# Altium PCB D1.PcbDoc (part 2 of 2)
Units mm, origin at the board's own origin, x right, y up, seen from the top; angles counter-clockwise.
Board outline 109.98 x 80.01 mm, 2 copper layers (Top Layer, Bottom Layer); 249 components, 156 nets, 1213 pads, 95 vias.
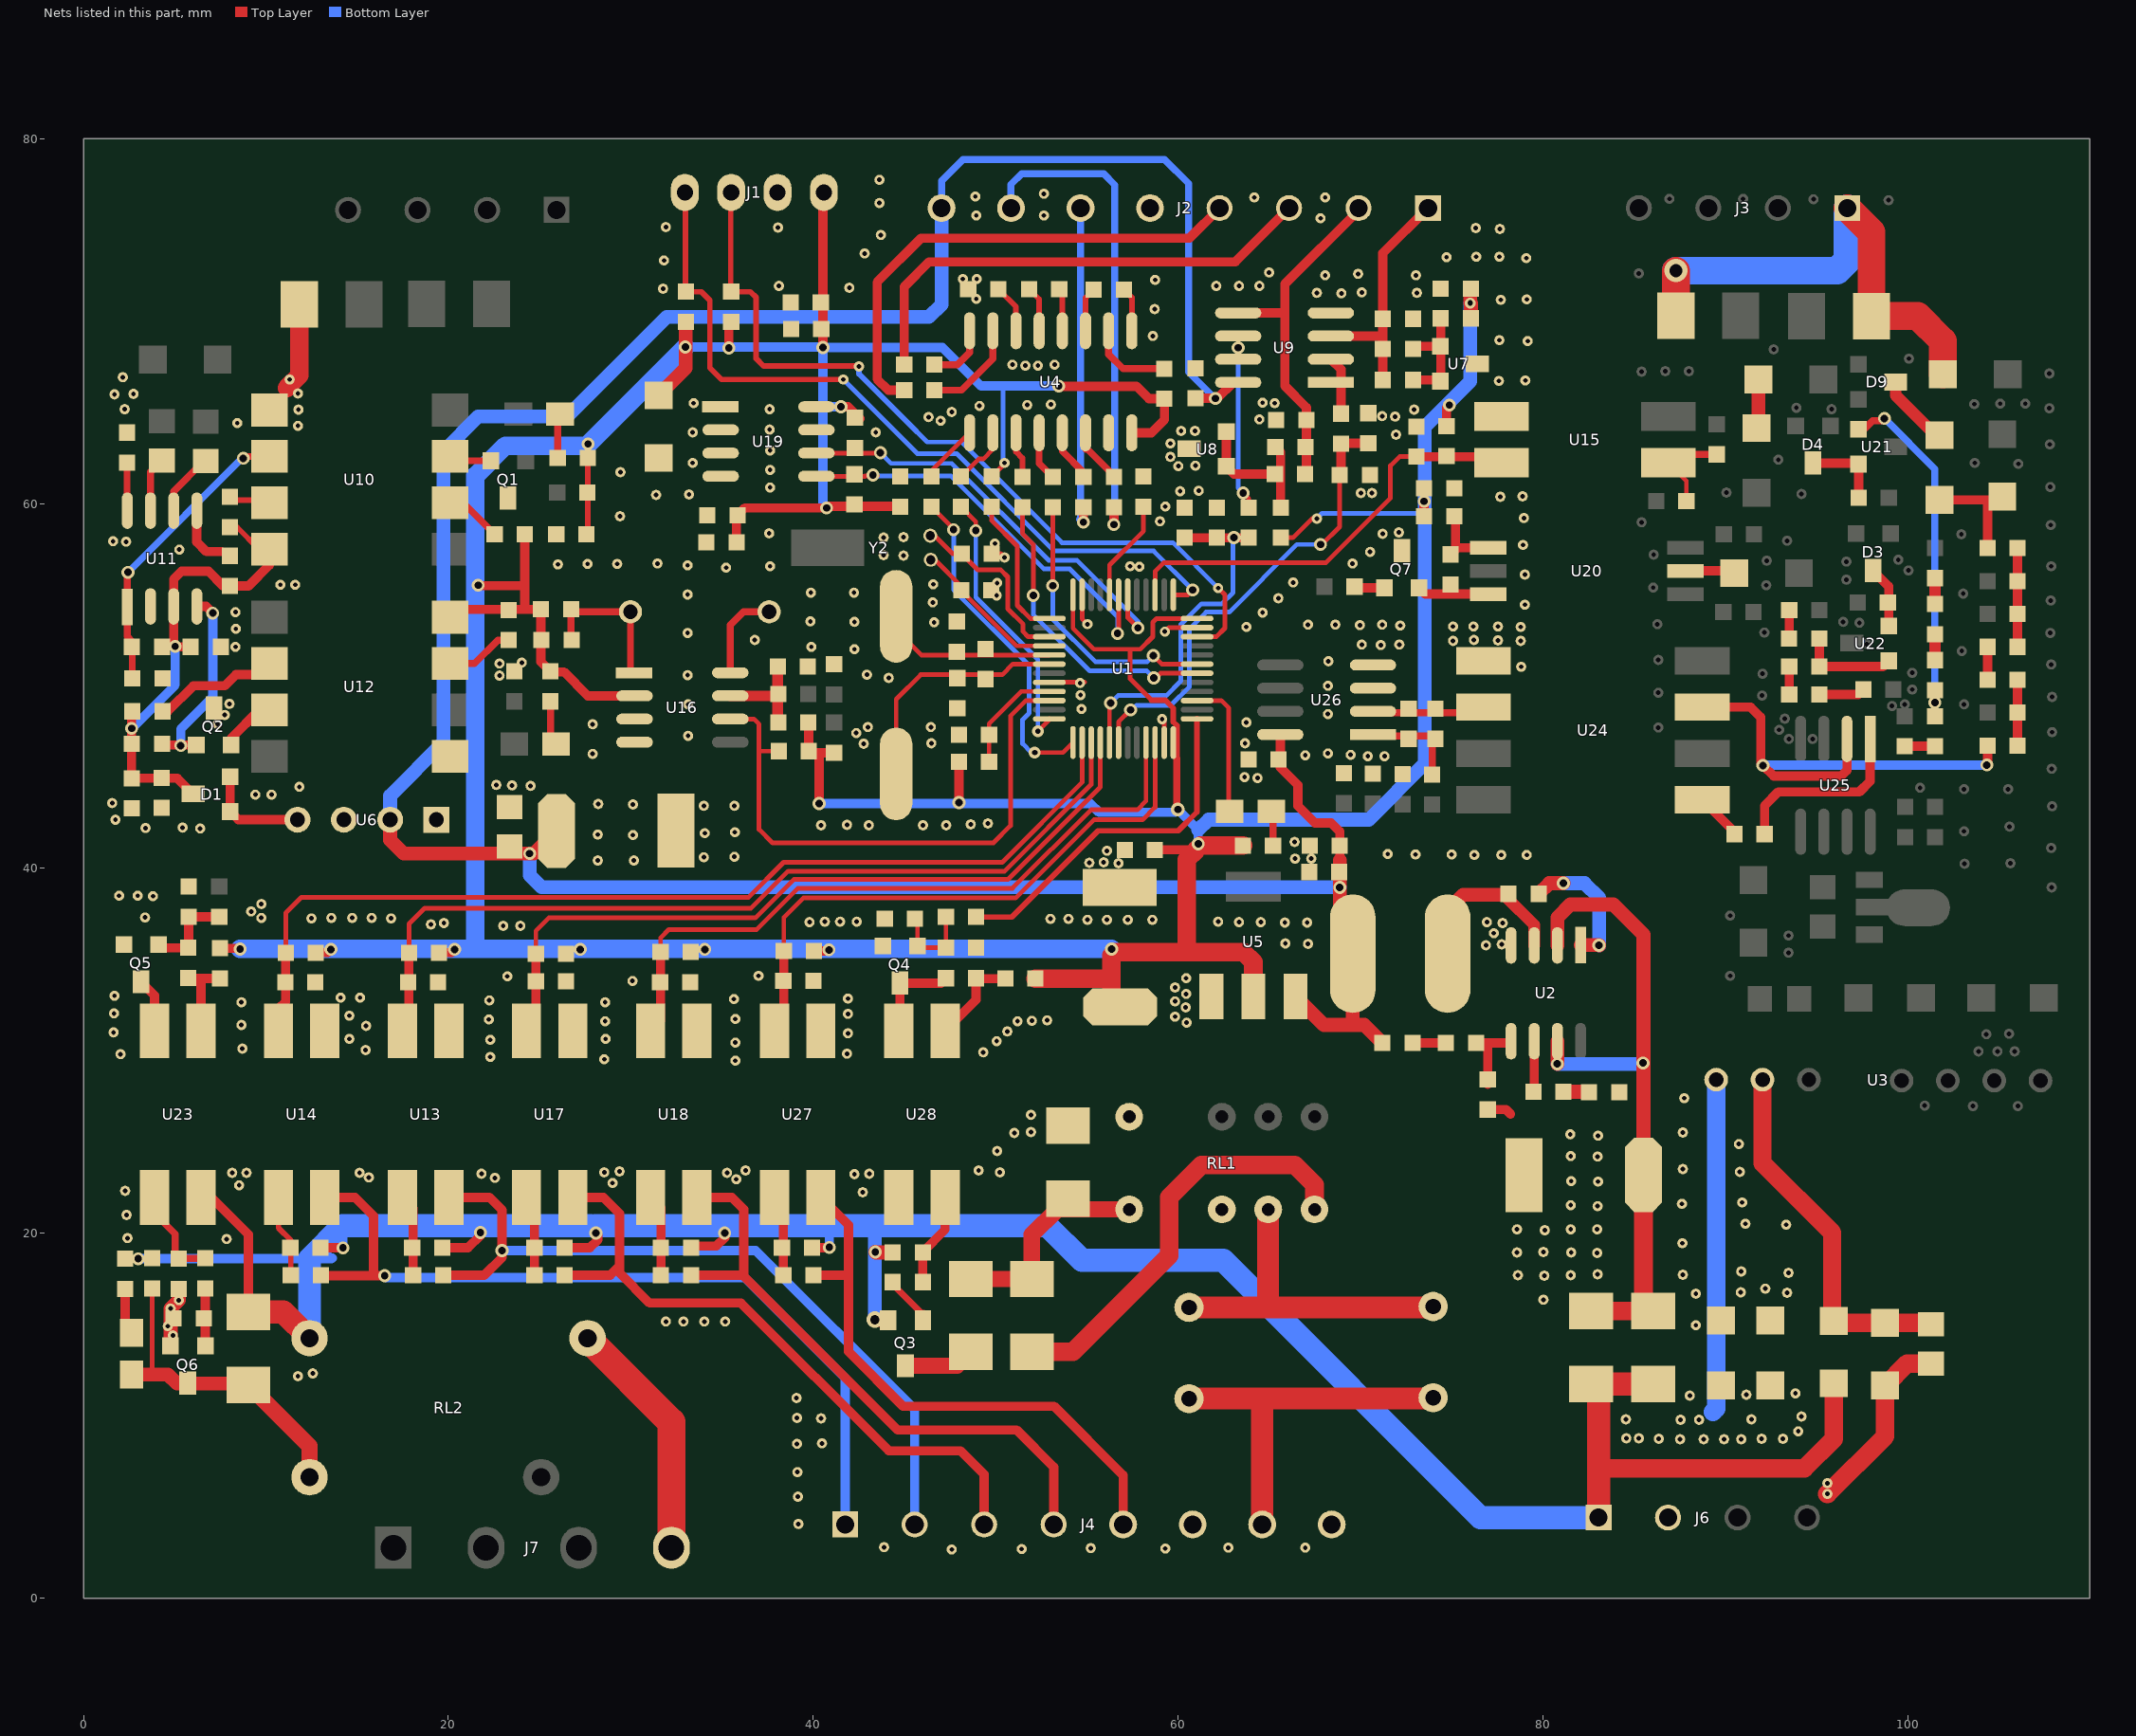
[diagram p2: the nets of this part, all layers, seen from the top]

## Via types
v1: diameter 0.711, hole 0.406, Top Layer to Bottom Layer, 77 vias
v2: diameter 0.559, hole 0.254, Top Layer to Bottom Layer, 12 vias
v3: diameter 0.66, hole 0.305, Top Layer to Bottom Layer, 2 vias
v4: diameter 0.914, hole 0.508, Top Layer to Bottom Layer, 1 vias
v5: diameter 1.27, hole 0.711, Top Layer to Bottom Layer, 1 vias
v6: diameter 0.762, hole 0.406, Top Layer to Bottom Layer, 1 vias
v7: diameter 0.61, hole 0.305, Top Layer to Bottom Layer, 1 vias

## Nets (pads, with @x,y where several pads share a name; then routed paths per layer and width w, separated by ;. In a path a pad name is that pad's centre, name@x,y a point inside that pad or via, vN(x,y) a via of type N, cw(c..) or ccw(c..) an arc to the next point about the centre after c; other vN are vias at no path point) (continued)
DGND: C1.2 C2.1 C3.1 C4.1 C8.1 C12.1 C14.1 C15.2 C16.2 C18.2 C19.2 C22.1 C23.1 C24.1 C25.1 C26.1 C28.2 C29.1 C30.1 C33.1 C34.1 C35.2 C38.2 C39.2 C41.2 C43.2 C44.2 C48.2 C49.2 C50.1 C51.1 C62.2 C66.1 C67.1 C68.1 C69.1 C71.2 EC1.2 EC2.2 EC5.2 J1.3 J2.5 L6.2 L7.2 pad.0@1.956,38.506 pad.1@2.972,38.506 pad.2@3.81,38.481 pad.3@3.378,37.313 pad.4@1.702,33.02 pad.5@1.676,32.055 pad.6@1.651,31.013 pad.7@2.032,29.82 pad.8@8.661,32.664 pad.9@8.661,31.42 pad.10@8.712,30.124 pad.11@9.754,38.049 pad.12@9.754,37.287 pad.13@9.195,37.643 pad.14@12.497,37.262 pad.15@13.589,37.287 pad.16@14.732,37.287 pad.17@15.799,37.287 pad.18@16.866,37.262 pad.19@14.097,32.918 pad.20@15.164,32.918 pad.21@14.58,31.928 pad.22@14.58,30.658 pad.23@15.494,31.369 pad.24@15.469,30.048 pad.25@19.05,36.932 pad.26@19.761,37.008 pad.27@23.012,36.855 pad.28@23.952,36.855 pad.29@23.241,34.087 pad.30@22.25,32.766 pad.31@22.225,31.725 pad.32@22.301,30.607 pad.33@22.301,29.667 pad.34@28.6,32.664 pad.35@28.6,31.623 pad.36@28.626,30.658 pad.37@28.55,29.54 pad.38@30.099,33.833 pad.39@37.008,34.112 pad.40@35.662,32.842 pad.41@35.738,31.75 pad.42@35.738,30.455 pad.43@35.738,29.464 pad.44@41.91,32.029 pad.45@41.91,30.963 pad.46@41.859,29.845 pad.47@41.91,32.868 pad.48@39.802,37.059 pad.49@40.64,37.084 pad.50@41.478,37.084 pad.51@42.393,37.084 pad.52@49.327,29.921 pad.53@50.063,30.531 pad.54@50.648,31.064 pad.55@51.206,31.623 pad.56@51.994,31.648 pad.57@52.832,31.674 pad.58@53.01,37.236 pad.59@54,37.236 pad.60@55.042,37.186 pad.61@56.109,37.186 pad.62@57.252,37.186 pad.63@58.598,37.186 pad.64@55.143,40.31 pad.65@55.931,40.335 pad.66@56.744,40.284 pad.67@56.109,40.97 pad.68@60.452,33.985 pad.69@60.452,33.122 pad.70@60.427,32.385 pad.71@60.477,31.547 pad.72@59.842,33.477 pad.73@59.842,32.715 pad.74@59.842,31.877 pad.75@62.205,37.084 pad.76@63.348,37.059 pad.77@64.541,37.059 pad.78@65.862,37.033 pad.79@67.081,37.033 pad.80@65.888,35.89 pad.81@67.132,35.865 pad.82@71.501,40.792 pad.83@73.025,40.767 pad.84@75.006,40.767 pad.85@76.251,40.742 pad.86@77.724,40.742 pad.87@79.121,40.742 pad.88@81.509,25.425 pad.89@81.534,24.232 pad.90@81.559,22.86 pad.91@81.534,21.539 pad.92@81.534,20.218 pad.93@81.559,18.948 pad.94@81.534,17.704 pad.95@83.033,25.349 pad.96@83.007,24.206 pad.97@83.033,22.835 pad.98@83.007,21.488 pad.99@82.982,20.218 pad.100@82.982,18.923 pad.101@83.007,17.755 pad.102@80.112,20.168 pad.103@78.588,20.218 pad.104@78.588,18.948 pad.105@80.035,18.974 pad.106@78.638,17.704 pad.107@80.086,17.678 pad.108@80.035,16.358 pad.109@87.757,27.407 pad.110@87.681,25.527 pad.111@87.681,23.52 pad.112@87.63,21.615 pad.113@87.655,19.456 pad.114 pad.115@88.392,16.688 pad.116@88.392,14.961 pad.117@90.754,24.892 pad.118@90.805,23.368 pad.119@92.202,16.967 pad.120@93.345,20.472 pad.121@90.932,21.692 pad.122@91.11,20.523 pad.123@90.881,17.907 pad.124@93.472,17.831 pad.125@90.856,16.764 pad.126@93.396,16.739 pad.132@22.631,44.577 pad.133@23.495,44.552 pad.134@24.511,44.526 pad.135@37.617,65.176 pad.136@37.617,64.059 pad.137@37.643,62.916 pad.138@37.643,61.849 pad.139@37.643,60.884 pad.140@29.439,61.722 pad.141@29.413,59.309 pad.142@31.394,60.477 pad.143@33.198,60.503 pad.144@26.01,56.667 pad.145@27.635,56.693 pad.146@29.261,56.693 pad.147@31.471,56.718 pad.148@33.122,56.617 pad.149@35.23,56.49 pad.150@37.592,58.369 pad.151@37.643,56.566 pad.152@43.866,58.141 pad.153@44.958,58.166 pad.154@43.866,57.175 pad.155@44.958,57.15 pad.156@39.878,55.118 pad.157@42.24,55.118 pad.158@39.853,53.543 pad.159@42.266,53.518 pad.160@39.903,52.146 pad.161@42.266,52.019 pad.162@42.951,50.622 pad.163@33.122,55.016 pad.164@33.122,52.908 pad.165@33.122,50.597 pad.166@33.147,48.997 pad.167@33.147,47.269 pad.168@28.219,43.536 pad.169@30.124,43.51 pad.170@28.194,41.859 pad.171@30.124,41.834 pad.172@28.194,40.437 pad.173@30.175,40.437 pad.174@34.011,43.434 pad.175@35.687,43.434 pad.176@34.061,41.935 pad.177@35.712,41.986 pad.178@34.011,40.615 pad.179@35.687,40.64 pad.180@43.002,47.752 pad.181@42.774,46.838 pad.182@46.457,47.752 pad.183@46.482,46.863 pad.184@44.145,50.444 pad.185@27.915,47.904 pad.186 pad.187 pad.188 pad.189 pad.190 pad.191 pad.192 pad.193 pad.194 pad.195 pad.196 pad.197 pad.198 pad.199 pad.200 pad.201 pad.202 pad.203 pad.204 pad.205 pad.206 pad.207 pad.208 pad.209 pad.210 pad.211 pad.212 pad.213 pad.214 pad.215 pad.216 pad.217 pad.218 pad.219 pad.220 pad.221 pad.222 pad.223 pad.224 pad.225 pad.226 pad.227 pad.228 pad.229 pad.230 pad.231 pad.232 pad.233 pad.234 pad.235 pad.236 pad.237 pad.238 pad.239 pad.240 pad.241 pad.242 pad.243 pad.244 pad.245 pad.246 pad.247 pad.248 pad.249 pad.250 pad.251 pad.252 pad.253 pad.254 pad.255 pad.256 pad.257 pad.258 pad.259 pad.260 pad.261 pad.262 pad.263 pad.264 pad.265 pad.266 pad.267 pad.268 pad.269 pad.270 pad.271 pad.272 pad.273 pad.274 pad.275 pad.276 pad.277 pad.278 pad.279 pad.280 pad.281 pad.282 pad.283 pad.284 pad.285 pad.286 pad.287 pad.288 pad.289 pad.290 pad.291 pad.292 pad.293 pad.294 pad.295 pad.296 pad.297 pad.298 pad.299 pad.300 pad.301 pad.302 pad.303 pad.304 pad.305 pad.306 pad.307 pad.308 pad.309 pad.311 pad.312 pad.313 pad.314 pad.315 pad.316 pad.317 pad.318 pad.319 pad.320 pad.321 pad.322 pad.323 pad.324 pad.325 pad.326 pad.327 pad.328 pad.329 pad.330 pad.331 pad.332 pad.333 pad.334 pad.335 pad.336 pad.337 pad.338 Q1.2 Q4.3 Q5.3 Q7.2 R6.2 R7.2 R19.1 R30.1 R31.1 R90.2 R91.1 R94.2 U1.8 U1.23 U1.35 U1.47 U2.4 U4.15 U5.1 U6.1 U7.2 U8.2 U9.4 U12.5 U13.3 U14.3 U15.3 U16.3 U16.4 U17.3 U18.3 U19.1 U19.2 U19.3 U19.4 U19.7 U24.5 U26.3 U26.4 U27.3 | length 9.8
  Top Layer w0.254: C30.1@49.771,55.334 C30.1@49.771,55.245 50.089,55.562 v2(50.089,55.651) ; C33.1@49.797,57.252 50.292,57.252 pad.330@50.495,57.048 ; U1.8@52.948,50.202 54.876,50.202 pad.322@54.889,50.216 ; U1.47@54.748,55.002 54.748,53.685 v2(55.042,53.391) ; v2(59.131,48.184) 59.248,48.067 U1.23@59.248,46.902 ; v2(59.284,52.984) 59.502,53.202 U1.35@61.048,53.202
  Top Layer w0.508: R6.2@76.987,26.784 77.991,26.784 78.232,26.543
  Bottom Layer w0.254: v2@50.013,55.118 50.013,55.016 v2(50.063,54.966)
  other v2: 49.962,57.81
DI1: C39.1 R49.1 U1.14 U14.4 | length 55.4
  Top Layer w0.254: R49.1@11.087,35.382 11.087,37.554 11.951,38.417 36.462,38.417 38.379,40.335 50.368,40.335 54.75,44.717 54.75,46.9 U1.14@54.748,46.902
  Top Layer w0.508: U14.4@10.692,31.105 10.692,32.307 11.087,32.703 R49.1@11.087,35.382
DI1-DET: C37.1 J4.1 U14.2 | length 45.4
  Top Layer w0.508: C37.1@13.018,17.704 13.043,17.678 v1(16.51,17.678) ; U14.2@13.232,21.961 14.894,21.961 15.9,20.955 15.9,17.704
  Bottom Layer w0.508: v1(16.51,17.678) 16.612,17.577 36.246,17.577 41.758,12.065 J4.1@41.758,4.039
DI2: C38.1 R47.1 U1.15 U13.4 | length 48.9
  Top Layer w0.254: R47.1@17.843,35.382 17.843,36.957 18.707,37.821 36.601,37.821 38.633,39.853 50.496,39.853 55.248,44.604 U1.15@55.248,46.902
  Top Layer w0.508: U13.4@17.49,31.105 17.843,31.458 R47.1@17.843,35.382
DI2-DET: C36.1 J4.2 U13.2 | length 42
  Top Layer w0.508: C36.1@19.723,17.704 21.971,17.704 22.941,18.674 v1(22.941,19.05) 22.941,21.28 22.26,21.961 U13.2@20.03,21.961
  Bottom Layer w0.508: v1(22.941,19.05) 36.855,19.05 45.568,10.338 J4.2@45.568,4.039
DI3: C48.1 R55.1 U1.16 U17.4 | length 42.3
  Top Layer w0.254: R55.1@24.803,35.331 24.803,36.576 25.514,37.287 36.83,37.287 38.938,39.395 50.673,39.395 55.748,44.47 U1.16@55.748,46.902
  Top Layer w0.508: U17.4@24.289,31.105 24.803,31.619 C48.1@24.803,33.807 R55.1@24.803,35.331
DI3-DET: C46.1 J4.3 U17.2 | length 37.4
  Top Layer w0.508: U17.2@26.365,21.497 U17.2@26.829,21.961 28.509,21.961 29.387,21.083 29.387,18.212 ; C46.1@26.378,17.704 28.879,17.704 29.387,18.212 ; J4.3@49.378,4.039 49.378,6.782 48.082,8.077 44.145,8.077 36.043,16.18 31.039,16.18 29.387,17.832 29.387,18.212
DI4: C49.1 R57.1 U1.21 U18.4 | length 38.2
  Top Layer w0.254: R57.1@31.636,35.433 31.636,36.195 32.093,36.652 36.906,36.652 39.167,38.913 50.927,38.913 55.232,43.218 57.772,43.218 58.248,43.693 U1.21@58.248,46.902
  Top Layer w0.508: U18.4@31.088,31.105 31.636,31.653 R57.1@31.636,35.433
DI4-DET: C47.1 J4.4 U18.2 | length 33.9
  Top Layer w0.508: C47.1@33.312,17.704 36.144,17.704 36.195,17.653 ; U18.2@33.628,21.961 35.545,21.961 36.195,21.311 36.195,17.653 ; J4.4@53.188,4.039 53.188,7.188 51.156,9.22 44.628,9.22 36.195,17.653
DI5: C71.1 R96.1 U1.22 U27.4 | length 32.8
  Top Layer w0.254: R96.1@38.392,35.484 38.392,37.313 39.459,38.379 51.105,38.379 55.397,42.672 58.064,42.672 58.748,43.355 U1.22@58.748,46.902
  Top Layer w0.508: U27.4@37.887,31.105 38.392,31.611 R96.1@38.392,35.484
DI5-DET: C70.1 J4.5 U27.2 | length 31.6
  Top Layer w0.508: C70.1@40.018,17.704 41.935,17.704 ; U27.2@40.427,21.961 41.935,20.452 41.935,17.704 ; J4.5@56.998,4.039 56.998,6.731 53.213,10.516 44.933,10.516 41.935,13.513 41.935,17.704
DP3V3: C1.1 C2.2 C3.2 C4.2 C11.2 C12.2 C18.1 C28.1 C31.1 C34.2 C42.1 C43.1 C44.1 EC5.1 J1.4 R1.2 R2.2 R3.2 R13.1 R18.2 R20.2 R21.2 R33.2 R36.2 R41.1 R42.1 R47.2 R49.2 R50.1 R53.2 R55.2 R57.2 R58.1 R59.1 R60.1 R61.1 R65.1 R77.1 R79.2 R96.2 R97.1 U1.24 U1.36 U1.48 U4.16 U5.2 U12.8 U16.2 U19.8 | length 320.6
  Top Layer w0.254: R18.2@49.784,61.481 50.495,62.192 v2(50.495,62.23) ; U1.48@54.248,55.002 54.248,53.169 55.397,52.019 57.379,52.019 ; 58.547,49.232 57.379,50.4 57.379,52.019 ; U1.36@61.048,53.702 58.833,53.702 58.623,53.492 58.623,52.705 57.937,52.019 57.379,52.019 ; R21.2@65.634,58.128 66.306,58.128 67.361,59.182 v2(67.615,59.182)
  Top Layer w0.305: C28.1@27.572,58.318 27.648,58.395 R36.2@27.648,62.509 27.648,63.259 v1(27.661,63.271) ; 58.547,49.232 59.302,49.232 59.748,48.787 59.748,48.031 59.944,47.835 59.944,46.05
  Top Layer w0.381: 59.944,46.05 59.944,43.282 v6(59.995,43.231)
  Top Layer w0.508: R79.2@7.493,35.623 8.547,35.623 v1(8.585,35.585) ; R49.2@12.738,35.382 13.386,35.382 v1(13.564,35.56) ; R47.2@19.494,35.382 20.168,35.382 v1(20.345,35.56) ; U12.8@20.088,53.772 20.52,54.204 24.232,54.204 ; v1(21.641,55.524) 21.666,55.499 24.194,55.499 ; R33.2@24.194,58.318 24.194,55.499 ; U16.2@30.209,49.46 27.654,49.46 26.34,50.775 25.641,50.775 R41.1@25.603,50.813 25.082,51.333 R53.2@25.082,54.204 24.232,54.204 ; v1(35.382,68.529) 35.382,69.837 R3.2@35.509,69.964 ; C34.2@35.801,57.887 35.801,59.309 C43.1@35.852,59.36 36.258,59.766 v1(40.742,59.766) 40.831,59.855 44.755,59.855 C4.2@44.78,59.83 ; R59.1@39.738,48.006 39.764,47.981 R58.1@39.764,46.431 39.853,46.342 40.488,46.342 ; R96.2@40.043,35.484 40.818,35.484 v1(40.869,35.535) ; v1(40.335,43.561) 40.335,46.19 40.488,46.342 ; v1(40.538,68.555) 40.538,77.013 J1.4@40.589,77.064 ; R60.1@41.148,46.342 40.488,46.342 ; v1(41.529,65.31) 41.917,65.31 R61.1@42.57,64.656 ; v1(47.993,43.612) R13.1@47.993,45.847 ; v1(53.467,66.446) 53.492,66.421 57.734,66.421 58.407,65.748 C11.2@59.258,65.748 59.258,64.592 58.552,63.886 U4.16@57.473,63.886 ; EC5.1@56.363,32.878 EC5.1@56.602,32.639 ; C3.2@58.738,41.021 61.011,41.021 v1@61.227,41.237 ; R97.1@73.495,59.309 v1(73.495,60.122) ; R50.1@74.727,64.249 74.727,65.253 v1(74.879,65.405) ; 24.194,55.499 24.194,54.242 24.232,54.204
  Top Layer w0.762: C1.1@31.534,65.936 33.02,67.423 R1.2@33.02,69.964 ; v7(76.022,70.993) C44.1@76.022,71.755 ; R20.2@76.06,70.155 v7@76.06,70.993
  Top Layer w1.016: R77.1@52.184,33.96 56.363,33.96 ; EC5.1@56.363,32.878 56.363,33.96 ; 56.363,35.23 56.363,33.96 ; v1@56.54,35.408 60.477,35.408 ; v1@61.011,41.021 60.477,40.488 60.477,35.408 ; v1@61.239,41.25 R2.2@63.564,41.25 ; U5.2@64.135,32.992 64.135,34.874 63.602,35.408 60.477,35.408
  Bottom Layer w0.254: v2(50.495,62.23) 50.419,62.154 50.419,66.345 50.521,66.446 ; v2(67.615,59.182) 67.894,59.461 73.533,59.461
  Bottom Layer w0.508: v1(32.995,68.58) 40.564,68.58 v1(40.538,68.555) ; v1(40.335,43.561) 55.194,43.561 55.677,43.078 59.842,43.078 v6(59.995,43.231) 61.112,42.113 v1(61.112,41.351) ; v1(40.742,59.766) 40.538,59.969 40.538,65.329 ; v1(41.529,65.31) 40.558,65.31 40.538,65.329 ; v1(53.467,66.446) 50.521,66.446 49.2,66.446 47.092,68.555 v1(40.538,68.555) ; 40.538,65.329 v1(40.538,68.555)
  Bottom Layer w0.762: 61.112,42.113 61.671,42.672 70.46,42.672 73.533,45.745 73.533,59.461 73.533,64.211 76.022,66.7 v7(76.022,70.993)
  Bottom Layer w1.016: v1(8.585,35.585) 21.488,35.585 ; v1@27.584,63.17 23.139,63.17 21.488,61.519 21.488,35.585 ; v1@27.673,63.259 v1(32.995,68.58) ; v1(56.363,35.585) 21.488,35.585
  other v1: 27.229,35.56 34.061,35.56
EL+: DC4.2 DC5.2 J4.7 | length 20.4
  Top Layer w1.2: DC5.2@60.604,10.937 64.618,10.937 ; J4.7@64.618,4.039 64.618,10.937 ; DC4.2@73.99,10.987 73.939,10.937 64.618,10.937
  Bottom Layer w1.2: DC4.2@73.939,10.937 DC4.2@73.99,10.987
FAN1: C55.2 D7.1 LED4.2 Q6.2 RL2.1 | length 18.2
  Top Layer w0.254: C55.2@3.759,16.98 3.759,12.418 3.912,12.266
  Top Layer w0.762: LED4.2@2.633,12.266 3.912,12.266 4.625,12.266 5.124,11.767 8.501,11.767 D7.1@8.797,12.063
  Top Layer w0.9: D7.1@8.797,12.063 D7.1@9.144,11.716 ; D7.1@9.042,11.691 12.395,8.338 RL2.1@12.395,6.629
FG: J3.1 L5.1 TVS3.1 TVS4.1 | length 27.7
  Top Layer w1.524: TVS3.1@87.3,70.307 v5(87.3,72.771) ; J3.1@96.698,76.2 98.019,74.879 TVS4.1@98.019,70.282 100.559,70.282 101.934,68.906 L5.1@101.934,67.093
  Bottom Layer w1.524: v5(87.3,72.771) 96.139,72.771 96.698,73.33 J3.1@96.698,76.2
IN-ADA: R84.2 U24.3 U25.2 | length 26.3
  Top Layer w0.508: U24.3@88.748,48.844 91.389,48.844 91.948,48.285 91.948,45.771 v1(92.075,45.644) 92.659,45.06 96.368,45.06 96.679,45.371 U25.2@96.679,47.098 ; v1(104.343,45.669) v1@104.381,45.631 ; R84.2@104.381,46.736 v1@104.381,45.631 ; v1@104.381,45.631 104.394,45.618 104.381,45.606 v1@104.381,45.631
  Bottom Layer w0.508: v1(92.075,45.644) 92.1,45.669 v1(104.343,45.669)
LOCK1: R85.1 U1.25 | length 19.6
  Top Layer w0.305: R85.1@48.933,37.338 50.902,37.338 55.626,42.062 60.02,42.062 61.048,43.09 U1.25@61.048,48.202
NetC5_2: C5.2 D12.2 DC1.1 U3.2 | length 20
  Top Layer w1: U3.2@92.05,28.423 92.05,23.851 95.86,20.041 D12.2@95.86,15.354 ; D12.2@95.961,15.202 96.078,15.086 101.147,15.086 C5.2@101.211,15.022
NetC7_2: C7.2 U2.1 | length 7.5
  Top Layer w0.762: C7.2@79.769,38.608 80.353,39.192 v1(81.128,39.192) ; U2.1@82.074,35.81 83.062,35.81 v1(83.083,35.789)
  Bottom Layer w0.762: v1(81.128,39.192) 82.296,39.192 83.083,38.405 v1(83.083,35.789)
NetC9_1: C9.1 U2.6 | length 2.5
  Top Layer w0.508: C9.1@79.515,28.067 79.534,28.086 U2.6@79.534,30.53
NetC9_2: C9.2 R7.1 | length 1.4
  Top Layer w0.762: C9.2@81.14,27.762 82.512,27.762 R7.1@82.537,27.737
NetC10_1: C10.1 U4.3 | length 2.4
  Top Layer w0.305: U4.3@54.933,69.474 54.933,71.281 C10.1@55.385,71.733
NetC10_2: C10.2 U4.1 | length 2.4
  Top Layer w0.305: C10.2@57.036,71.733 57.473,71.297 U4.1@57.473,69.474
NetC11_1: C11.1 U4.2 | length 4.7
  Top Layer w0.381: U4.2@56.203,69.474 56.203,68.181 56.985,67.399 C11.1@59.258,67.399
NetC13_1: C13.1 U4.5 | length 2.5
  Top Layer w0.305: C13.1@51.842,71.759 52.393,71.208 U4.5@52.393,69.474
NetC13_2: C13.2 U4.4 | length 2.4
  Top Layer w0.305: C13.2@53.493,71.759 53.663,71.589 U4.4@53.663,69.474
NetC14_2: C14.2 U4.6 | length 2.7
  Top Layer w0.305: C14.2@50.153,71.759 51.123,70.789 U4.6@51.123,69.474
NetC19_1: C19.1 R13.2 U1.9 | length 6.1
  Top Layer w0.254: R13.2@49.644,45.847 C19.1@49.644,47.32 49.644,47.937 51.41,49.702 U1.9@52.948,49.702
NetC32_1: C32.1 R35.1 U10.6 U11.1 | length 16.3
  Top Layer w0.381: v1(2.438,56.236) 2.438,56.197 2.407,56.166 U11.1@2.407,54.334 2.407,52.711 2.68,52.438 C32.1@2.68,50.419 ; v1(8.763,62.484) 8.865,62.586 U10.6@10.188,62.586
  Bottom Layer w0.381: v1(2.438,56.236) 8.687,62.484 v1(8.763,62.484)
NetC36_2: C36.2 R46.1 U13.1 | length 4.5
  Top Layer w0.508: U13.1@17.49,21.961 18.072,21.379 C36.2@18.072,17.704
NetC37_2: C37.2 R48.1 U14.1 | length 4.5
  Top Layer w0.308: U14.1@10.692,21.961 10.692,20.296 11.367,19.621 C37.2@11.367,17.704
NetC40_1: C40.1 R52.2 U15.1 | length 5.3
  Top Layer w0.254: U15.1@87.346,62.7 U15.1@86.883,62.238 87.871,61.25 R52.2@87.871,60.147
  Top Layer w0.381: U15.1@87.346,62.7 C40.1@89.535,62.7
NetC42_2: C42.2 R53.1 SW1.1 U16.1 | length 8.1
  Top Layer w0.381: C42.2@26.759,52.527 26.733,52.553 R53.1@26.733,54.204 26.871,54.066 SW1.1@29.987,54.066 U16.1@29.987,50.922
NetC46_2: C46.2 R54.1 U17.1 | length 4.4
  Top Layer w0.508: U17.1@24.289,21.961 24.727,21.523 R54.1@24.727,19.202 C46.2@24.727,17.704
NetC47_2: C47.2 R56.1 U18.1 | length 4.5
  Top Layer w0.508: U18.1@31.088,21.961 31.661,21.388 R56.1@31.661,19.202 C47.2@31.661,17.704
NetC50_2: C50.2 R59.2 R64.1 U16.7 | length 5.4
  Top Layer w0.584: U16.7@35.459,49.46 R64.1@37.827,49.46 ; R59.2@38.062,48.031 C50.2@38.062,51.079
NetC53_1: C53.1 D4.2 U21.3 | length 4.4
  Top Layer w0.508: D4.2@94.805,62.221 97.261,62.221 U21.3@97.316,62.166 97.32,62.163 C53.1@97.32,60.325
NetC54_1: C54.1 D3.2 U22.3 | length 3.4
  Top Layer w0.508: D3.2@98.107,56.328 98.965,55.471 U22.3@98.965,53.287
NetC56_1: C56.1 R77.2 U28.1 | length 5.2
  Top Layer w0.508: U28.1@47.236,31.105 48.933,32.802 C56.1@48.933,33.985 48.959,33.96 R77.2@50.533,33.96
NetC56_2: C56.2 Q4.2 U28.2 | length 5.3
  Top Layer w0.508: U28.2@44.696,31.105 44.757,31.165 Q4.2@44.757,33.712 47.009,33.712 C56.2@47.282,33.985
NetC57_1: C57.1 R79.1 U23.1 | length 4.6
  Top Layer w0.508: C57.1@5.766,33.972 6.502,33.972 ; U23.1@6.444,31.105 6.444,33.914 6.502,33.972 ; R79.1@7.493,33.972 6.502,33.972
NetC57_2: C57.2 Q5.1 R88.1 R90.1 | length 5.1
  Top Layer w0.508: Q5.1@4.117,35.82 4.288,35.649 C57.2@5.74,35.649 5.766,35.674 R90.1@5.766,37.351 R88.1@7.442,37.351
NetC58_1: C58.1 R86.1 R93.1 U26.1 | length 5.9
  Top Layer w0.381: U26.1@70.11,47.263 73.823,47.263 73.939,47.146 R93.1@73.939,45.148
NetC58_2: C58.2 R86.2 U24.6 U26.2 | length 6.8
  Top Layer w0.381: U26.2@70.11,48.533 76.437,48.533 U24.6@76.748,48.844
NetC60_1: C60.1 C61.1 R81.2 R82.1 | length 5.4
  Top Layer w0.508: R82.1@106.032,52.146 C60.1@106.032,53.95 R81.2@106.033,57.556
NetC62_1: C62.1 Q4.1 R85.2 R91.2 | length 4.8
  Top Layer w0.254: C62.1@45.58,37.236 45.722,37.095 Q4.1@45.722,35.744 45.805,35.662 R91.2@47.282,35.662 R85.2@47.282,37.338
NetC65_1: C65.1 Q6.1 R87.2 | length 3.2
  Top Layer w0.254: Q6.1@6.68,13.851 Q6.1@6.733,13.799
  Top Layer w0.508: Q6.1@6.68,13.851 R87.2@6.68,16.98
NetC70_2: C70.2 R95.1 U27.1 | length 4.5
  Top Layer w0.508: U27.1@37.887,21.961 38.367,21.481 C70.2@38.367,17.704
NetC72_1: C72.1 R97.2 U20.1 | length 4
  Top Layer w0.508: C72.1@74.955,57.213 C72.1@75.222,57.48 ; R97.2@75.222,59.309 C72.1@75.222,57.48 ; U20.1@77.013,57.582 75.324,57.582 C72.1@75.222,57.48
NetC72_2: C72.2 Q7.3 U20.3 | length 3.9
  Top Layer w0.508: Q7.3@73.216,55.381 73.555,55.042 U20.3@77.013,55.042
NetD1_1: D1.1 D1.3 U6.5 | length 5.8
  Top Layer w0.508: D1.3@8.043,45.022 D1.1@8.043,43.117 8.488,42.672 U6.5@11.735,42.672
NetD5_1: D5.1 Q3.2 | length 2.8
  Top Layer w0.889: Q3.2@45.06,12.74 D5.1@47.887,12.74
NetD5_2: D5.2 D6.1 D8.2 RL1.1 | length 11.7
  Top Layer w0.9: D5.2@48.641,17.494 D6.1@51.994,17.494 51.994,19.92 53.384,21.311 RL1.1@57.328,21.311
NetD6_2: D6.2 RL1.5 | length 23.4
  Top Layer w1.016: D6.2@51.994,13.494 54.236,13.494 59.512,18.771 59.512,21.971 61.29,23.749 66.396,23.749 67.488,22.657 RL1.5@67.488,21.311
NetD9_2: D9.2 L4.1 | length 4
  Top Layer w0.635: D9.2@99.348,66.662 99.348,65.93 101.524,63.754 L4.1@101.752,63.754
NetDC2_1: DC2.1 L4.2 R81.1 | length 6.2
  Top Layer w0.508: L4.2@101.752,60.198 104.216,60.198 ; R81.1@104.382,57.556 104.382,60.033 104.216,60.198 ; DC2.1@105.195,60.378 105.015,60.198 104.216,60.198
NetDC4_1: DC4.1 DC5.1 RL1.4 | length 18.9
  Top Layer w1.2: DC5.1@60.604,15.937 65.176,15.937 ; RL1.4@64.948,21.311 64.948,16.165 65.176,15.937 ; DC4.1@73.99,15.987 73.939,15.937 65.176,15.937
  Bottom Layer w1.2: DC4.1@73.939,15.937 DC4.1@73.99,15.987
NetL3_2: L3.2 R51.2 | length 2.7
  Top Layer w0.762: R51.2@91.72,64.143 91.821,64.244 L3.2@91.821,66.802
NetLED1_1: LED1.1 R2.1 | length 2.2
  Top Layer w0.381: LED1.1@65.149,43.417 65.215,43.352 R2.1@65.215,41.25
NetLED2_1: LED2.1 R36.1 | length 2.5
  Top Layer w0.381: R36.1@25.997,62.509 25.997,64.768 LED2.1@26.134,64.906
NetLED3_1: LED3.1 R41.2 | length 2.5
  Top Layer w0.381: R41.2@25.603,49.162 25.603,47.123 LED3.1@25.906,46.821
NetLED4_1: LED4.1 R98.2 | length 2.5
  Top Layer w0.508: R98.2@2.286,16.954 2.286,14.899 LED4.1@2.633,14.552
NetQ1_3: Q1.3 U10.3 | length 2.3
  Top Layer w0.381: U10.3@20.088,62.586 20.326,62.348 Q1.3@22.339,62.348
NetQ2_1: Q2.1 R45.2 U11.4 | length 10.9
  Top Layer w0.508: R45.2@4.305,46.838 4.373,46.77 Q2.1@6.185,46.77 ; U11.4@6.217,54.364 6.723,54.364 v1(7.087,54)
  Bottom Layer w0.508: v1(5.334,46.736) 5.334,47.65 7.087,49.403 v1(7.087,54)
NetQ2_3: Q2.3 U12.3 | length 3.1
  Top Layer w0.508: Q2.3@8.09,46.77 8.09,47.13 9.652,48.692 U12.3@10.188,48.692
NetQ3_1: Q3.1 R78.2 | length 2.7
  Top Layer w0.381: R78.2@44.272,17.297 44.272,17.323 R78.2@44.361,17.323 ; R78.2@44.361,17.209 46.076,15.494 Q3.1@46.076,15.608
NetQ5_2: Q5.2 U23.2 | length 3
  Top Layer w0.508: Q5.2@3.152,33.788 3.904,33.036 U23.2@3.904,31.105
NetQ7_1: Q7.1 R63.2 | length 1.7
  Top Layer w0.508: R63.2@69.685,55.448 69.752,55.381 Q7.1@71.311,55.381
NetR4_1: R4.1 R5.2 | length 1.8
  Top Layer w0.508: R5.2@72.86,30.429 R4.1@74.689,30.429
NetR4_2: R4.2 R6.1 U2.5 | length 4.3
  Top Layer w0.508: R4.2@76.34,30.429 77.114,30.429 ; R6.1@76.987,28.181 76.987,30.302 77.114,30.429 ; U2.5@78.264,30.53 78.163,30.429 77.114,30.429
NetR9_2: R9.2 U4.12 | length 2.7
  Top Layer w0.381: U4.12@52.393,63.886 52.393,62.208 R9.2@53.145,61.456
NetR10_1: R10.1 U4.13 | length 2.9
  Top Layer w0.381: U4.13@53.663,63.886 53.663,62.873 54.817,61.718 R10.1@54.817,61.455
NetR11_2: R11.2 U4.9 | length 3.3
  Top Layer w0.254: R11.2@46.482,61.481 46.482,61.785 U4.9@48.583,63.886
NetR12_1: R12.1 U4.8 | length 3.4
  Top Layer w0.381: R12.1@46.647,67.615 47.904,67.615 48.583,68.293 U4.8@48.583,69.474
NetR14_2: R14.2 U4.11 | length 2.6
  Top Layer w0.305: U4.11@51.123,63.886 51.123,62.847 51.473,62.497 R14.2@51.473,61.456
NetR15_1: R15.1 U4.14 | length 3.2
  Top Layer w0.381: U4.14@54.933,63.886 54.933,62.974 55.06,62.974 56.49,61.544 R15.1@56.49,61.455
NetR16_2: R16.2 U4.10 | length 3
  Top Layer w0.254: R16.2@48.108,61.481 49.075,62.448 49.327,62.448 49.853,62.974 U4.10@49.853,63.576
NetR17_1: R17.1 U4.7 | length 5.5
  Top Layer w0.381: R17.1@46.647,66.218 48.133,66.218 49.853,67.937 U4.7@49.853,69.474
NetR18_1: R18.1 U1.1 | length 8
  Top Layer w0.254: R18.1@49.784,59.83 49.784,59.08 51.194,57.671 51.194,54.419 51.911,53.702 U1.1@52.948,53.702
NetR19_2: R19.2 U1.44 | length 5.6
  Top Layer w0.254: U1.44@56.248,55.002 56.248,56.629 58.115,58.496 R19.2@58.115,59.83
NetR20_1: R20.1 R24.2 R25.2 U7.1 U7.3 | length 6.5
  Top Layer w0.508: R24.2@72.885,66.777 74.316,66.777 U7.3@74.38,66.713 74.409,66.742 R20.1@74.409,70.155 ; R25.2@72.885,68.478 73.025,68.618 U7.1@74.38,68.618
NetR21_1: R21.1 R26.2 R27.2 U8.1 U8.3 | length 8.2
  Top Layer w0.508: U8.3@62.653,63.945 U8.1@62.653,62.04 63.072,61.62 R27.2@65.316,61.62 ; R26.2@65.342,63.106 65.634,62.814 R21.1@65.634,59.779
NetR28_2: R28.2 U9.1 U9.2 | length 3.2
  Top Layer w0.508: U9.2@68.383,67.913 68.936,67.361 R28.2@68.936,64.935
NetR29_2: R29.2 U9.6 U9.7 | length 9
  Top Layer w0.254: v1(63.576,60.579) 63.881,60.274 R29.2@63.881,59.779
  Bottom Layer w0.254: v1(63.303,68.548) 63.303,60.852 v1(63.576,60.579)
NetR33_1: R33.1 U10.2 | length 3.2
  Top Layer w0.381: U10.2@20.088,60.046 20.815,60.046 R33.1@22.543,58.318
NetR34_1: R34.1 U10.7 | length 2.2
  Top Layer w0.305: R34.1@8.052,60.185 U10.7@10.049,60.185
  Top Layer w0.508: U10.7@10.049,60.185 U10.7@10.188,60.046
NetR37_1: R37.1 U11.8 | length 2.6
  Top Layer w0.381: R37.1@2.388,62.243 2.388,59.634 U11.8@2.407,59.614
NetR38_1: R38.1 U11.7 | length 3
  Top Layer w0.381: U11.7@3.677,59.614 3.677,61.741 R38.1@4.293,62.357
NetR39_1: R39.1 U11.6 | length 3.5
  Top Layer w0.381: U11.6@4.947,59.614 4.947,60.674 6.604,62.332 R39.1@6.706,62.332
NetR42_2: R42.2 U12.7 | length 3.8
  Top Layer w0.381: U12.7@20.088,51.232 21.438,51.232 22.72,52.514 R42.2@23.317,52.514
NetR43_2: R43.2 U12.2 | length 6.9
  Top Layer w0.508: R43.2@4.331,48.616 4.623,48.616 6.02,50.013 7.747,50.013 8.357,50.622 9.449,50.622 10.058,51.232 U12.2@10.188,51.232
NetR44_2: R44.2 U11.5 | length 3.3
  Top Layer w0.508: U11.5@6.217,59.614 6.217,57.893 6.744,57.366 7.569,57.366
NetR62_2: R62.2 U20.5 | length 2.8
  Top Layer w0.508: U20.5@87.813,56.312 90.467,56.312 R62.2@90.593,56.186
NetR66_1: R66.1 R69.2 | length 1.5
  Top Layer w0.508: R69.2@93.51,52.612 R66.1@93.51,54.153
NetR67_1: R67.1 R68.2 | length 1.4
  Top Layer w0.635: R68.2@101.498,54.496 R67.1@101.498,55.918
NetR68_1: R68.1 R70.2 | length 1.4
  Top Layer w0.635: R70.2@101.498,51.422 R68.1@101.498,52.845
NetR69_1: R69.1 R71.2 U22.1 | length 5.5
  Top Layer w0.508: R69.1@95.161,52.612 R71.2@95.161,51.071 98.654,51.071 U22.1@98.965,51.382
NetR70_1: R70.1 R72.2 U21.1 | length 18.4
  Top Layer w0.381: U21.1@97.316,64.071 97.625,64.071 98.095,64.541 98.603,64.541 v1(98.73,64.668)
  Bottom Layer w0.381: v1(98.73,64.668) 101.498,61.9 v1(101.498,49.098)
NetR71_1: R71.1 R73.2 | length 1.5
  Top Layer w0.508: R73.2@93.51,49.53 R71.1@93.51,51.071
NetR72_1: R72.1 R75.2 | length 1.7
  Top Layer w0.508: R75.2@99.847,46.698 R72.1@101.498,46.698
NetR73_1: R73.1 R74.2 | length 2.5
  Top Layer w0.508: R73.1@95.161,49.53 97.295,49.53 R74.2@97.574,49.809
NetR76_1: R76.1 R78.1 U28.4 | length 5.1
  Top Layer w0.5: R78.1@46.012,17.323 R76.1@46.012,18.948 46.012,18.986 47.236,20.211 U28.4@47.236,21.961
NetR80_1: R80.1 U25.1 | length 10.2
  Top Layer w0.508: R80.1@92.164,41.885 92.164,43.447 92.913,44.196 97.358,44.196 97.949,44.786 U25.1@97.949,47.098
NetR80_2: R80.2 U24.1 | length 2.6
  Top Layer w0.508: U24.1@88.748,43.764 90.513,41.999 R80.2@90.513,41.885
NetR82_2: R82.2 R83.1 | length 1.8
  Top Layer w0.508: R83.1@104.381,50.343 R82.2@104.381,52.146
NetR83_2: R83.2 R84.1 R89.2 | length 3.6
  Top Layer w0.508: R84.1@106.033,46.736 R83.2@106.033,50.343
NetR87_1: R87.1 R92.1 U23.3 | length 5.4
  Top Layer w0.381: U23.3@3.904,21.961 3.904,21.09 5.029,19.964 5.029,18.809 R92.1@5.232,18.605 5.258,18.631 R87.1@6.68,18.631
NetSW1_2: SW1.2 U16.8 | length 5
  Top Layer w0.381: U16.8@35.459,50.73 35.459,53.341 36.184,54.066 SW1.2@37.592,54.066
RUN: LED1.2 U1.27 | length 7.6
  Top Layer w0.254: U1.27@61.048,49.202 62.38,49.202 62.789,48.793 62.789,43.186 LED1.2@62.837,43.138
SCL: R61.2 U1.42 U19.6 | length 23.9
  Top Layer w0.254: U19.6@40.183,62.77 43.669,62.77 v1(43.688,62.789) ; U1.42@57.248,55.002 57.248,53.75 v1(57.81,53.188)
  Bottom Layer w0.254: v1(43.688,62.789) 44.272,62.205 47.6,62.205 52.908,56.896 54.458,56.896 57.81,53.543 v1(57.81,53.188)
SDA: R65.2 U1.43 U19.5 | length 22.8
  Top Layer w0.254: U19.5@40.183,61.5 42.831,61.5 42.85,61.519 v1@43.536,61.519 ; v1(56.693,52.883) 56.748,52.938 U1.43@56.748,55.002
  Bottom Layer w0.254: v1@43.536,61.519 47.549,61.519 52.654,56.413 54.077,56.413 56.693,53.797 v1(56.693,52.883)
  other v1: 43.282,61.57
SGND: C5.1 C65.2 D8.1 DC1.2 J4.6 J4.8 J6.2 L6.1 L7.1 pad.0@42.266,23.241 pad.1@43.078,23.266 pad.2@42.723,22.25 pad.3@5.232,16.332 pad.4@4.623,14.91 pad.5@4.777,15.877 pad.6@4.902,14.402 pad.7@2.286,22.327 pad.8@2.362,21.006 pad.9@2.413,19.736 pad.10@8.153,23.317 pad.11@8.941,23.317 pad.12@8.534,22.631 pad.13@15.138,23.317 pad.14@15.646,23.063 pad.15@21.819,23.266 pad.16@22.555,23.038 pad.17@11.76,12.167 pad.18@12.573,12.319 pad.19@7.849,19.685 pad.20@28.55,23.343 pad.21@29.388,23.393 pad.22@29.007,22.758 pad.23@35.281,23.317 pad.24@36.297,23.444 pad.25@35.789,22.962 pad.26@49.073,23.444 pad.27@50.241,23.343 pad.28@51.029,25.502 pad.29@51.943,25.552 pad.30@51.943,26.492 pad.31@50.089,24.511 pad.32@31.928,15.164 pad.33@32.893,15.164 pad.34@34.036,15.164 pad.35@35.179,15.164 pad.36@39.091,10.973 pad.37@40.437,9.855 pad.38@39.116,9.881 pad.39@39.116,8.458 pad.40@40.488,8.484 pad.41@39.141,6.909 pad.42@39.167,5.563 pad.43@39.192,4.064 pad.44@43.891,2.794 pad.45@47.6,2.667 pad.46@51.435,2.692 pad.47@55.22,2.743 pad.48@59.309,2.718 pad.49@62.763,2.769 pad.50@66.98,2.769 pad.148@85.268,8.763 pad.149@86.36,8.738 pad.150@87.528,8.712 pad.151@88.824,8.712 pad.152@89.941,8.712 pad.153@90.881,8.712 pad.154@91.999,8.738 pad.155@93.167,8.738 pad.156@94.005,9.144 pad.157@94.183,9.957 pad.158@91.44,9.804 pad.159@88.57,9.779 pad.160@87.554,9.779 pad.161@84.557,9.804 pad.162@84.582,8.763 pad.163@88.062,11.1 pad.164@91.161,11.151 pad.165@93.853,11.227 pad.166@95.606,6.299 pad.167@95.606,5.715 Q6.3 R92.2 RL1.3 RL1.12 U3.1 U28.3 | length 31.9
  Top Layer w0.762: Q6.3@4.777,13.832 pad.5@4.777,15.877 pad.3@5.232,16.332 R92.2@5.232,16.954
  Top Layer w1.016: pad.167@95.606,5.715 98.767,8.877 DC1.2@98.767,11.655 99.976,12.863 C5.1@101.287,12.863
  Bottom Layer w1.016: 89.332,10.211 89.51,10.389 U3.1@89.51,28.423
STOP-IN: J7.4 RL2.4 | length 13.4
  Top Layer w1.524: RL2.4@27.635,14.249 32.233,9.652 J7.4@32.233,2.769
SW0: C7.1 L1.1 U2.3 | length 8.1
  Top Layer w0.508: C7.1@77.991,38.443 C7.1@77.991,38.557
  Top Layer w0.635: C7.1@77.991,38.443 79.534,36.9 U2.3@79.534,35.78
  Top Layer w0.762: L1.1@74.787,36.551 74.787,37.703 75.641,38.557 C7.1@77.991,38.557
SWCLK: J1.1 R1.1 U1.37 | length 43
  Top Layer w0.254: U1.37@59.748,55.002 60.54,55.002 v1(60.808,55.27)
  Top Layer w0.305: J1.1@32.969,77.064 32.995,77.038 R1.1@32.995,71.996 ; R1.1@33.02,71.615 33.871,71.615 34.341,71.145 34.341,67.437 34.976,66.802 v2(41.656,66.802)
  Bottom Layer w0.254: v2(41.656,66.802) 45.72,62.738 47.879,62.738 53.213,57.404 58.674,57.404 v1(60.808,55.27)
SWIO: J1.2 R3.1 U1.34 | length 44.8
  Top Layer w0.254: U1.34@61.048,52.702 62.1,52.702 62.573,53.175 62.573,55.004 v2(62.205,55.372)
  Top Layer w0.305: R3.1@35.484,71.996 35.484,77.038 J1.2@35.509,77.064 ; R3.1@35.509,71.615 36.563,71.615 36.881,71.298 36.881,67.945 37.287,67.539 42.494,67.539 v2(42.52,67.513)
  Bottom Layer w0.254: 45.669,63.957 46.253,63.373 48.133,63.373 53.645,57.861 59.72,57.861 62.205,55.377 v2(62.205,55.372)
  Bottom Layer w0.305: v2(42.52,67.513) 42.52,67.107 45.669,63.957
T+: C25.2 J2.2 R26.1 R27.1 U9.5 | length 19.3
  Top Layer w0.508: U9.5@63.303,70.453 65.856,70.453 65.862,70.46 ; R27.1@66.967,61.62 67.043,61.697 C25.2@67.043,64.592 67.043,65.265 65.862,66.446 65.862,70.46 ; J2.2@69.901,76.2 69.901,76.073 65.862,72.034 65.862,70.46
T-: C24.2 J2.1 R24.1 R25.1 U9.3 | length 13.3
  Top Layer w0.508: U9.3@68.383,69.183 71.189,69.183 71.234,69.139 ; R24.1@71.234,66.777 71.234,69.139 ; J2.1@73.711,76.2 71.234,73.723 C24.2@71.234,70.129 71.234,69.139
TA: C23.2 R29.1 R31.2 U1.17 | length 19.8
  Top Layer w0.254: U1.17@56.248,46.902 56.248,49.009 v1(56.312,49.073)
  Top Layer w0.508: C23.2@60.376,58.128 R29.1@63.881,58.128
  Bottom Layer w0.254: v1(56.312,49.073) 56.718,49.479 59.36,49.479 60.16,50.279 60.16,53.378 61.29,54.508 62.408,54.508 63.017,55.118 63.017,58.09 v1(63.068,58.141)
TB: C22.2 R28.1 R30.2 U1.18 | length 25.6
  Top Layer w0.254: U1.18@56.748,46.902 56.748,48.035 v1@57.379,48.666 ; v1(67.818,57.76) 67.894,57.76 68.872,58.737 C22.2@68.872,61.57
  Top Layer w0.508: C22.2@68.872,61.57 68.936,61.633 R28.1@68.936,63.284 68.961,63.309 R30.2@70.434,63.309
  Bottom Layer w0.254: v1(57.404,48.692) 57.48,48.692 57.734,48.946 59.614,48.946 60.63,49.962 60.63,53.137 61.544,54.051 62.814,54.051 66.523,57.76 v1(67.818,57.76)
TEST_CC: C41.1 R50.2 U1.39 U15.4 | length 24.1
  Top Layer w0.254: U1.39@58.748,55.002 58.748,56.286 59.23,56.769 68.123,56.769 71.653,60.3 71.653,62.078 72.149,62.573 C41.1@73.076,62.573
  Top Layer w0.508: C41.1@73.076,62.573 77.404,62.573 U15.4@77.739,62.238
U1-RX: J2.6 R10.2 | length 18.3
  Top Layer w0.508: v1(54.817,58.979) R10.2@54.817,59.804
  Bottom Layer w0.381: v1@54.661,59.135 J2.6@54.661,76.2
  Bottom Layer w0.508: v1@54.661,59.135 v1(54.817,58.979) ; J2.6@54.661,76.2 J2.6@54.817,76.043
U1-RXD: R9.1 U1.31 | length 15.3
  Top Layer w0.254: v1(53.137,55.499) 53.145,55.507 R9.1@53.145,59.805 ; v1(58.649,51.664) 59.11,51.202 U1.31@61.048,51.202
  Bottom Layer w0.254: v1(53.137,55.499) 53.137,53.67 55.474,51.333 58.318,51.333 v1(58.649,51.664)
U1-TX: J2.7 R15.2 | length 27.1
  Top Layer w0.508: v1(56.49,58.852) R15.2@56.49,59.804
  Bottom Layer w0.381: J2.7@50.851,76.2 50.851,77.495 51.435,78.08 55.931,78.08 56.54,77.47 v1@56.54,58.903
  Bottom Layer w0.508: v1(56.49,58.852) v1@56.54,58.903
U1-TXD: R14.1 U1.30 | length 16.7
  Top Layer w0.254: R14.1@51.473,59.805 51.473,58.357 52.07,57.76 v1(52.07,54.966) ; v1(58.674,50.444) 58.793,50.444 59.051,50.702 U1.30@61.048,50.702
  Bottom Layer w0.254: v1(52.07,54.966) 52.07,53.924 55.169,50.825 58.293,50.825 v1(58.674,50.444)
U2-RX: J2.3 R12.2 | length 27.2
  Top Layer w0.508: R12.2@44.996,67.615 44.996,71.895 46.355,73.254 63.144,73.254 J2.3@66.091,76.2
U2-TX: J2.4 R17.2 | length 27.5
  Top Layer w0.508: R17.2@44.996,66.04 R17.2@45.022,66.04 ; R17.2@44.996,66.218 44.12,66.218 43.51,66.827 43.51,72.136 45.923,74.549 60.63,74.549 J2.4@62.281,76.2
U2_RXD: R11.1 U1.13 | length 18.5
  Top Layer w0.254: R11.1@46.482,59.83 47.701,58.61 v1(47.701,58.572) ; v3(52.146,46.355) 53.7,46.355 U1.13@54.248,46.902
  Bottom Layer w0.254: v1(47.701,58.572) 47.701,55.27 51.841,51.13 51.841,48.514 51.486,48.158 51.486,46.838 51.968,46.355 v3(52.146,46.355)
U2_TXD: R16.1 U1.12 | length 15
  Top Layer w0.254: R16.1@48.108,59.83 48.92,59.017 v1(48.92,58.522) ; v3(52.324,47.523) 52.948,48.147 U1.12@52.948,48.202
  Bottom Layer w0.254: v1(48.92,58.522) 48.92,54.864 52.324,51.46 v3(52.324,47.523)
VCAN: C21.1 C27.1 D1.2 R22.2 R34.2 R35.2 R43.1 R44.1 R45.1 U10.8 U11.3 | length 27.1
  Top Layer w0.305: R34.2@8.026,58.712 8.42,58.712 9.627,57.506 U10.8@10.188,57.506
  Top Layer w0.508: R43.1@2.68,48.616 2.642,48.578 v1(2.642,47.676) R22.2@2.642,44.945 5.147,44.945 D1.2@6.011,44.082 ; v1@4.947,52.229 U11.3@4.947,54.364 4.947,55.848 5.385,56.286 6.853,56.286 7.653,55.486 R44.1@8.026,55.486 9.055,55.486 10.188,56.62 U10.8@10.188,57.506 ; v1@5.029,52.146 C27.1@5.88,52.146
  Bottom Layer w0.508: v1(2.642,47.676) 5.029,50.063 v1(5.029,52.172)
VDD5V: C8.2 C15.1 C16.1 C68.2 C69.2 EC2.1 J2.8 L1.2 R5.1 U5.3 U6.4 U9.8 U26.8 | length 169.4
  Top Layer w0.508: C69.2@60.96,65.773 v1@62.052,65.773 ; v1@62.167,65.773 63.037,66.643 U9.8@63.303,66.643 ; U26.8@65.614,47.339 65.614,45.536 66.573,44.577 66.573,43.434 67.513,42.494 68.402,42.494 68.872,42.024 C8.2@68.872,41.25 68.872,40.462
  Top Layer w0.762: U6.4@16.815,42.672 16.815,41.554 17.551,40.818 v1(24.46,40.818) 24.7,40.818 EC2.1@25.933,42.051 ; U5.3@66.435,32.992 68.007,31.42 69.587,31.42 ; L1.2@68.774,36.144 L1.2@68.872,36.046 ; 68.872,40.462 v1(68.872,38.964) L1.2@68.872,36.046 ; R5.1@71.209,30.429 70.218,31.42 69.587,31.42 ; L1.2@68.872,36.046 L1.2@69.587,35.331 69.587,31.42
  Bottom Layer w0.381: J2.8@47.041,76.2 47.041,77.699 48.209,78.867 59.258,78.867 60.579,77.546 60.579,67.208 62.027,65.761 v1(62.052,65.761)
  Bottom Layer w0.762: U6.4@16.815,42.672 16.815,43.993 19.736,46.914 19.736,62.865 21.641,64.77 26.518,64.77 31.979,70.231 46.355,70.231 47.041,70.917 J2.8@47.041,76.2 ; v1(24.46,40.818) 24.46,39.624 25.121,38.964 v1(68.872,38.964)
VDD12V: D10.2 D11.2 EC1.1 U2.2 U2.7 | length 37.5
  Top Layer w0.762: v1(80.797,29.286) 80.804,29.28 U2.7@80.804,30.53 ; U2.2@80.804,35.78 80.804,37.313 81.515,38.024 83.871,38.024 85.522,36.373 EC1.1@85.522,23.201 ; D10.2@85.522,16.275 D10.2@86.055,15.741
  Top Layer w1: D11.2@82.652,15.741 D10.2@86.055,15.741
  Top Layer w1.016: D10.2@85.522,16.275 EC1.1@85.522,23.201
  Bottom Layer w0.762: v1(80.797,29.286) 85.496,29.286 v1(85.496,29.337)
VGND: C21.2 C27.2 C32.2 pad.66@2.159,66.929 pad.67@2.743,66.015 pad.68@1.702,65.989 pad.69@2.261,65.176 pad.70@11.303,66.802 pad.71@11.786,65.151 pad.72@8.433,64.414 pad.73@11.76,66.04 pad.74@10.795,55.55 pad.75@11.608,55.55 pad.168@1.626,57.937 pad.169@2.337,57.912 pad.170@5.258,57.48 pad.171@8.331,54.051 pad.172@8.357,53.137 pad.173@8.331,52.146 pad.174@7.341,47.913 pad.175@7.747,48.412 pad.176@8.001,49.022 pad.177@5.436,42.24 pad.178@6.401,42.189 pad.179@3.404,42.215 pad.180@1.753,42.672 pad.181@1.575,43.586 pad.182@9.423,44.044 pad.183@10.312,44.044 pad.184@11.836,44.475 pad.185@11.76,64.262 Q2.2 R22.1 R37.2 TVS1.2 U6.7 U10.5 U11.2 | length 4.9
  Top Layer w1.016: 11.151,66.345 11.836,67.031 TVS1.2@11.836,70.917
VS12V: C55.1 D7.2 D10.1 D11.1 D12.1 J6.1 Q3.3 R46.2 R48.2 R54.2 R56.2 R76.2 R95.2 R98.1 RL2.2 U23.4 | length 150.7
  Top Layer w0.508: U23.4@6.444,21.961 7.02,21.961 9.042,19.939 D7.2@9.042,15.691 ; R48.2@12.992,19.202 v1(14.224,19.202) ; R46.2@19.672,19.202 21.082,19.202 21.768,19.888 v1(21.768,20.041) ; R54.2@26.378,19.202 27.762,19.202 28.194,19.634 28.194,19.914 v1(28.092,20.015) ; R56.2@33.312,19.202 33.414,19.304 34.696,19.304 35.154,19.761 v1(35.154,20.015) ; R95.2@39.942,19.202 40.869,19.202 v1(40.894,19.228)
  Top Layer w0.762: v4(43.383,15.265) 43.409,15.24 Q3.3@44.12,15.24 ; v1(43.409,18.974) 43.434,18.948 R76.2@44.361,18.948
  Top Layer w1.016: 83.058,7.112 94.336,7.112 95.961,8.738 D12.1@95.961,11.773
  Top Layer w1.27: D7.2@9.042,15.691 10.954,15.691 RL2.2@12.395,14.249 ; D11.1@82.652,11.741 D11.1@83.464,11.741 ; J6.1@83.058,4.42 83.058,7.112 83.058,11.335 D11.1@83.464,11.741 ; D10.1@86.055,11.741 D11.1@83.464,11.741
  Bottom Layer w0.508: v1(2.997,18.605) 12.395,18.605 13.602,18.605 13.64,18.644 ; 14.211,20.422 14.224,20.409 v1(14.224,19.202) ; v1(40.894,19.228) 40.894,20.396 40.919,20.422
  Bottom Layer w0.762: v4(43.383,15.265) 43.383,20.32 43.485,20.422
  Bottom Layer w1.27: RL2.2@12.395,14.249 12.395,18.605 14.211,20.422 27.813,20.422 ; 28.092,20.422 40.919,20.422 43.485,20.422 52.832,20.422 54.737,18.517 62.484,18.517 76.581,4.42 J6.1@83.058,4.42
WDI: R58.2 U1.10 U16.6 | length 31.5
  Top Layer w0.254: U16.6@35.459,48.19 36.748,48.19 37.033,47.904 37.033,46.431 ; R58.2@38.113,46.431 37.033,46.431 ; U1.10@52.948,49.202 51.666,49.202 50.825,48.362 50.825,42.342 49.886,41.402 37.77,41.402 37.033,42.139 37.033,46.431
X1: C26.2 R32.1 U1.5 Y1.2 | length 9.7
  Top Layer w0.254: Y1.2@44.552,53.823 44.552,53.086 45.935,51.702 U1.5@52.948,51.702
X2: C29.2 R32.2 U1.6 Y1.1 | length 13.3
  Top Layer w0.254: Y1.1@44.552,45.187 44.552,49.276 45.898,50.622 50.368,50.622 50.948,51.202 U1.6@52.948,51.202
Y1: C33.2 U1.3 Y2.1 | length 10.1
  Top Layer w0.254: Y2.1@46.423,58.242 46.66,58.242 47.65,57.252 C33.2@48.146,57.252 49.035,56.363 50.292,56.363 50.673,55.982 50.673,54.229 51.511,53.391 51.511,52.982 51.791,52.702 U1.3@52.948,52.702
Y2: C30.2 U1.4 Y2.2 | length 8.4
  Top Layer w0.254: Y2.2@46.448,56.921 46.672,56.921 C30.2@48.146,55.448 ; C30.2@48.12,55.245 51.163,52.202 U1.4@52.948,52.202
pads on no net: J6.3 J6.4 RL1.8 RL1.9 RL1.10 U1.2 U1.20 U1.26 U1.29 U1.38 U1.40 U1.41 U1.45 U1.46 U2.8 U3.3 U3.5 U5.4 U10.1 U10.4 U12.1 U12.4 U16.5 U20.2 U24.7 U24.8 U25.5 U25.6 U25.7 U26.5 U26.6 U26.7 Y2.3

## Polygon pours and split planes (outlines as drawn)
VGND on Top Layer "Top Layer-No Net" (solid, pour order 12): 2.134,67.869 11.328,67.869 12.167,67.031 12.243,66.954 12.243,63.094 12.243,45.085 13.208,44.12 14.402,44.12 14.91,44.12 15.265,43.764 15.265,41.859 14.91,41.504 13.335,41.504 2.337,41.504 1.27,42.57 1.27,46.838 1.27,67.005 2.134,67.869
ASS_GND on Top Layer "Top Layer-No Net" (solid, pour order 9): 84.226,77.318 84.633,77.724 87.96,77.724 98.577,77.724 99.543,76.759 99.517,76.733 99.517,72.873 99.517,72.187 100.99,70.714 102.997,68.707 106.375,68.707 107.747,68.707 108.382,68.072 108.661,67.793 108.661,62.306 108.661,26.949 108.458,26.746 108.102,26.391 105.588,26.391 98.857,26.391 98.196,27.051 98.146,27.102 98.146,30.328 96.901,31.572 96.825,31.648 91.338,31.648 90.83,31.648 89.941,32.537 89.84,32.639 89.84,37.44 89.84,38.151 87.986,40.005 85.7,42.291 85.7,47.523 85.7,58.395 84.988,59.106 84.861,59.233 84.861,65.227 84.861,67.285 84.201,67.945 84.201,77.292
SGND on Top Layer "Top Layer-No Net" (solid, pour order 11): 1.499,21.971 3.404,23.876 5.207,23.876 48.793,23.876 52.4,27.483 52.705,27.788 62.789,27.788 68.072,27.788 69.088,26.772 69.088,19.583 69.088,18.872 70.206,17.755 70.358,17.602 74.701,17.602 75.184,17.12 75.463,16.84 75.463,14.173 75.463,13.665 77.114,12.014 77.495,11.633 85.065,11.633 94.031,11.633 96.139,9.525 96.139,7.747 96.139,2.997 95.25,2.108 95.072,1.93 81.686,1.93 40.716,1.93 38.862,3.785 38.583,4.064 38.583,10.998 38.583,11.989 35.712,14.859 35.687,14.884 32.182,14.884 31.623,14.884 29.312,17.196 17.628,17.196 15.926,17.196 14.681,17.196 14.097,16.612 13.767,16.281 13.767,13.487 13.767,12.878 12.421,11.532 12.395,11.506 4.318,11.506 3.073,11.506 1.626,12.954 1.499,12.954 1.499,21.971
DGND on Top Layer "Top Layer-No Net" (solid, pour order 16): 39.014,78.664 74.727,78.664 79.4,73.99 79.502,73.889 79.502,72.593 79.502,43.282 86.512,36.271 86.563,36.22 86.563,31.217 86.563,30.048 90.094,26.518 94.488,22.123 94.488,14.986 94.488,14.503 94.082,14.097 91.923,14.097 85.192,14.097 85.166,14.122 81.483,14.122 81.356,14.122 79.68,15.799 77.724,17.755 77.724,22.2 77.724,27.051 75.413,29.362 75.184,29.591 73.177,29.591 71.171,29.591 69.977,30.785 69.647,31.115 64.922,31.115 51.74,31.115 50.19,29.566 49.733,29.108 48.641,29.108 1.981,29.108 1.448,29.642 1.194,29.896 1.194,30.785 1.194,38.71 1.651,39.167 2.159,39.675 16.078,39.675 16.078,39.7 17.602,41.224 18.186,41.808 18.186,43.866 18.186,65.481 18.847,66.142 18.974,66.269 18.999,66.294 19.228,66.294 27.762,66.294 31.064,69.596 31.471,70.002 31.471,72.034 31.471,78.029 32.004,78.562 32.106,78.664 39.04,78.664
VGND on Bottom Layer "Top Layer-No Net" (solid, pour order 15): 2.261,67.869 11.328,67.869 12.167,67.031 12.243,66.954 12.243,66.218 12.243,45.085 12.929,44.399 13.208,44.12 14.605,44.12 14.834,44.12 15.164,43.79 15.215,43.739 15.215,42.24 15.215,41.808 14.961,41.554 14.91,41.504 14.224,41.504 2.311,41.504 1.575,42.24 1.245,42.57 1.245,43.891 1.245,66.98 2.032,67.767 2.134,67.869 2.261,67.869
ASS_GND on Bottom Layer "Top Layer-No Net" (solid, pour order 10): 84.785,77.724 98.577,77.724 99.517,76.784 99.568,76.733 99.568,74.574 99.568,72.136 101.905,69.799 102.997,68.707 104.775,68.707 107.747,68.707 108.331,68.123 108.661,67.793 108.661,66.345 108.661,26.949 108.179,26.467 108.128,26.416 108.102,26.391 107.798,26.391 98.857,26.391 98.527,26.721 98.425,26.822 98.425,28.194 98.425,29.693 96.317,31.801 96.291,31.826 90.932,31.826 90.653,31.826 89.84,32.639 89.84,34.011 89.84,38.151 87.859,40.132 85.674,42.316 85.674,47.396 85.674,58.42 84.963,59.131 84.836,59.258 84.836,60.681 84.836,67.31 84.277,67.869 84.201,67.945 84.201,69.037 84.201,77.292 84.607,77.699 84.633,77.724 84.785,77.724
SGND on Bottom Layer "Top Layer-No Net" (solid, pour order 14): 54.407,27.788 68.072,27.788 69.063,26.797 69.088,26.772 69.088,26.467 69.088,18.872 70.053,17.907 70.358,17.602 71.171,17.602 74.701,17.602 75.336,16.967 75.463,16.84 75.463,16.332 75.463,13.665 76.886,12.243 77.495,11.633 79.172,11.633 94.031,11.633 95.631,10.033 96.139,9.525 96.139,8.433 96.139,2.997 95.301,2.159 95.047,1.905 93.37,1.905 40.742,1.905 38.684,3.962 38.583,4.064 38.583,4.902 38.583,11.989 35.789,14.783 35.712,14.859 32.918,14.859 31.648,14.859 29.235,17.272 29.21,17.297 14.707,17.297 13.919,16.51 13.767,16.358 13.767,15.342 13.767,12.903 13.183,12.319 12.37,11.506 7.417,11.506 2.591,11.506 1.499,12.598 1.499,20.396 1.499,21.946 2.413,22.86 3.429,23.876 9.068,23.876 48.793,23.876 50.927,26.01 52.705,27.788 54.407,27.788
DGND on Bottom Layer "Top Layer-No Net" (solid, pour order 13): 31.445,78.029 32.106,78.689 35.509,78.689 74.676,78.689 78.105,75.26 79.477,73.889 79.477,62.789 79.477,43.282 85.852,36.906 86.538,36.22 86.538,30.531 86.538,30.15 87.63,29.058 87.63,29.032 92.329,24.333 94.463,22.2 94.463,14.961 94.463,14.503 94.082,14.122 84.455,14.122 81.382,14.122 77.699,17.805 77.699,23.368 77.699,24.486 77.699,27.076 76.454,28.321 75.184,29.591 72.238,29.591 71.171,29.591 70.028,30.734 69.647,31.115 62.103,31.115 51.74,31.115 50.19,29.566 49.759,29.134 45.263,29.134 1.956,29.134 1.524,29.566 1.194,29.896 1.194,34.696 1.219,34.722 1.219,38.76 2.134,39.675 9.5,39.675 16.053,39.675 16.993,40.615 18.212,41.834 18.212,45.288 18.212,65.507 18.999,66.294 21.26,66.294 26.924,66.294 29.439,68.809 31.445,70.815 31.445,78.003

## Keep-outs
Keep-Out Layer:
  circle w0.127: c5,75 r2.25
  lines w0.25: -0.025,78 0,2 ; 2,0 108,0 ; 2,80 108,80 ; 110,2 110,78
  lines w0.254: -0.025,78 cw(c1.987,77.987) 2,80 ; 0,2 ccw(c2,2) 2,0 ; 108,0.025 ccw(c108.013,2.013) 110,2 ; 108,80 cw(c108,78) 110,78
  lines w1: 2.134,40.234 5.08,40.234 ; 4.953,40.234 15.164,40.234 15.545,40.615 15.545,40.97 15.545,44.653 ; 14.097,4.115 14.097,5.613 ; 14.097,5.486 14.097,8.611 ; 19.736,2.286 19.736,3.886 20.777,4.928 28.346,4.928
  lines w1.5: 23.266,16.129 28.575,16.129 31.42,13.284 ; 88.976,30.632 95.936,30.632 97.206,29.362 97.206,26.873

## Silkscreen, mask and mechanical layers (free items; w line width, h text height)
Top Overlay:
  circle w0.127: c5,75 r5
  circle w0.127: c5,5 r5
  circle w0.127: c105,5 r5
  circle w0.127: c105,75 r5
  text "G" at 83.083,73.025 h2
  text "CC" at 86.893,73.025 h2
  text "CP" at 90.627,73.025 h2
  text "FG" at 94.361,73.025 h2
  text "RX1" at 52.578,72.974 h2
  text "G" at 56.337,72.974 h2
  text "TX2" at 60.071,72.974 h2
  text "RX2" at 63.83,72.974 h2
  text "T+" at 67.462,72.974 h2
  text "T-" at 71.247,72.974 h2
  text "5V" at 44.958,72.949 h2
  text "TX1" at 48.768,72.949 h2
  text "L" at 16.256,72.822 h2.54
  text "H" at 20.193,72.796 h2.54
  text "H" at 12.268,72.771 h2.54
  text "L" at 24.206,72.771 h2.54
  text "CLK" at 30.404,72.441 h2
  text "IO" at 34.392,72.415 h2
  text "G" at 36.805,72.415 h2
  text "3.3" at 39.345,72.415 h2
  text "MT-ACcharger V1.0.0" at 85.547,17.475 h2.54
  text "Dandelion" at 102.057,14.681 h1.78
  text "12V" at 80.95,5.69 h2.54
  text "GND" at 84.963,5.69 h2.54
  text "stop" at 28.727,5.232 h2.54
  text "DI1" at 39.446,5.08 h2.54
  text "DI2" at 43.282,5.08 h2.54
  text "DI3" at 47.142,5.08 h2.54
  text "DI4" at 51.105,5.08 h2.54
  text "DI5" at 54.991,5.08 h2.54
  text "COM" at 58.852,5.08 h2.54
  text "EL" at 64.973,5.08 h2.54
Mechanical 1:
  circle w0.127: c105,75 r2.25
  circle w0.127: c105,5 r2.25
  circle w0.127: c5,5 r2.25
Mechanical 2:
  lines w0.2: 121.5,230 cw(c121.5,229.5) 122,229.5

## Text inside footprints (layer, text, board x,y; h text height)
EC1: Top Overlay "+" at 86.844,20.895 h0.8 r180
EC2: Top Overlay "+" at 24.611,44.357 h0.8
EC5: Top Overlay "+" at 54.525,31.088 h0.8 r90
SW1: Top Overlay "ON" at 31.874,52.491 h0.8